# EAGLE board mainboard (EAGLE 9.6.2)
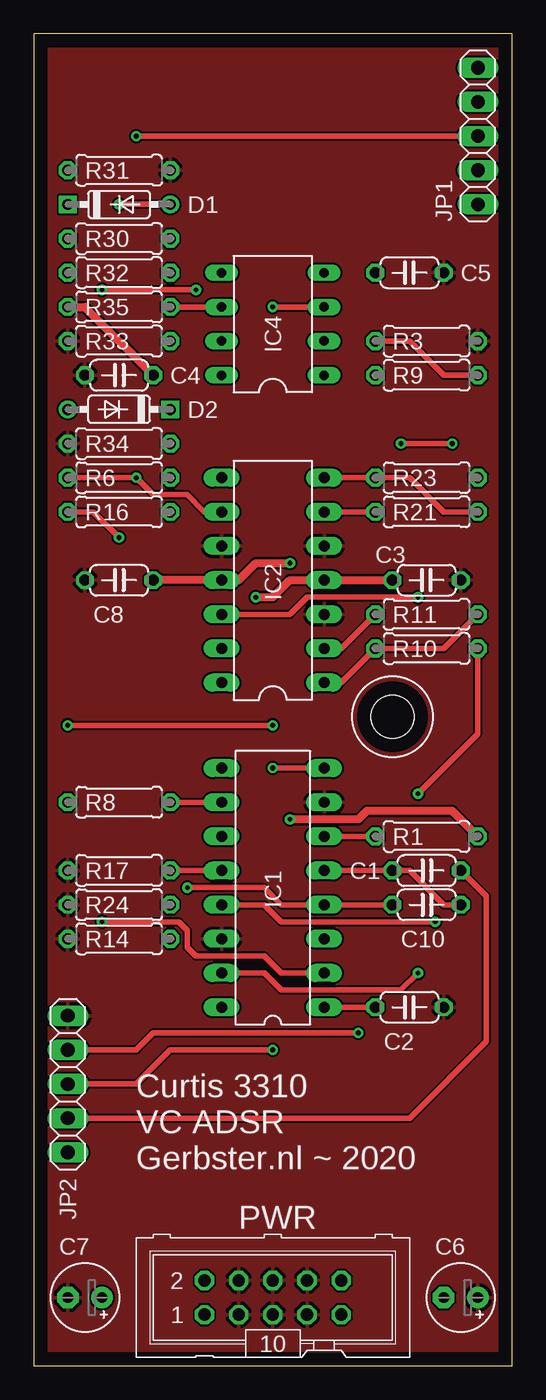
[diagram p0: board, top side]
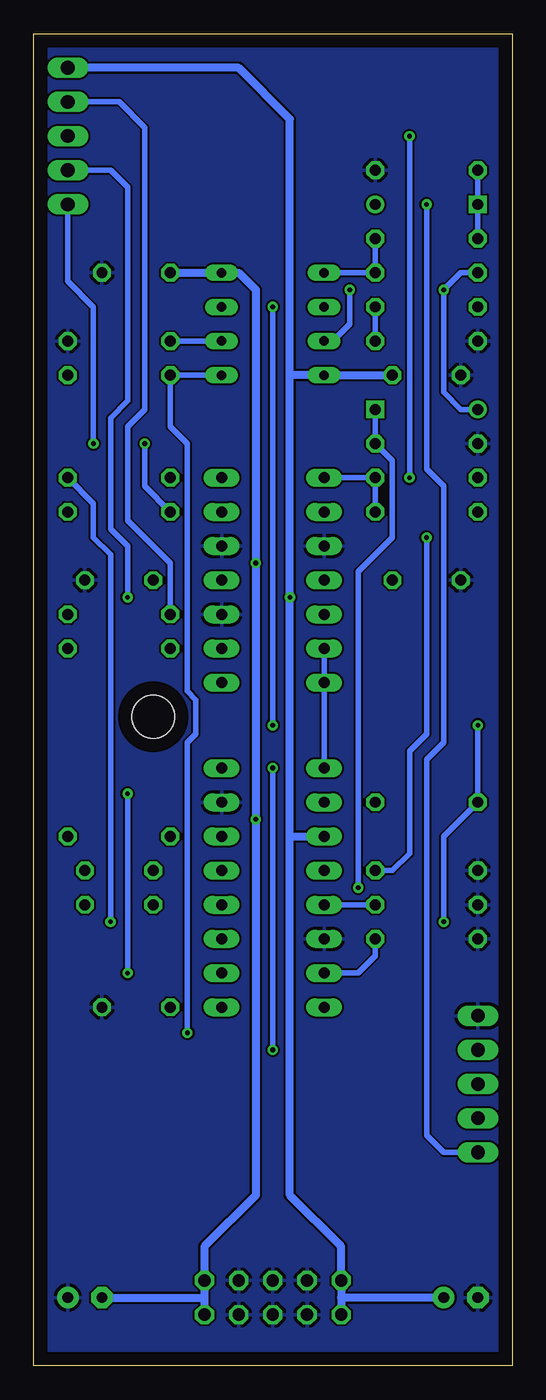
[diagram p1: board, bottom side, seen from below]

Size 35.56 x 99.06 mm. Coordinates in mm from the lower left corner, seen from the top.
Outline: 0,0 35.56,0 35.56,99.06 0,99.05 0,0
Copper layers (1*16): Top 0.035mm / dielectric 1.5mm / Bottom 0.035mm
Design rules "default": minimum track width 6mil, minimum drill 0.35mm, track to track 6mil, track to pad 6mil, pad to pad 6mil, via to via 6mil, smd to smd 6mil, copper to edge 40mil, drill to drill 6mil, minimum pad ring 10mil, minimum via ring 8mil, stop-mask expansion 4mil, vias tented up to drill 0mil, thermal gap 10mil
Holes 3.2 mm at 26.67,48.26

## Footprints (pad centres in the part's own frame; a part is rotated, then mirrored left to right if it is on the bottom)
C050-024X044 = drill 0.813 octagon: 1 -2.54,0; 2 2.54,0
E2,5-5 = drill 0.813 pad 1.6: + -1.27,0 | drill 0.813 pad 1.6 octagon: - 1.27,0
DO35-7 = drill 0.813: A 3.81,0 | drill 0.813 square: C -3.81,0
DIL16 = drill 0.813 long: 1 -8.89,-3.81; 2 -6.35,-3.81; 3 -3.81,-3.81; 4 -1.27,-3.81; 5 1.27,-3.81; 6 3.81,-3.81; 7 6.35,-3.81; 8 8.89,-3.81; 9 8.89,3.81; 10 6.35,3.81; 11 3.81,3.81; 12 1.27,3.81; 13 -1.27,3.81; 14 -3.81,3.81; 15 -6.35,3.81; 16 -8.89,3.81
DIL14 = drill 0.813 long: 1 -7.62,-3.81; 2 -5.08,-3.81; 3 -2.54,-3.81; 4 0,-3.81; 5 2.54,-3.81; 6 5.08,-3.81; 7 7.62,-3.81; 8 7.62,3.81; 9 5.08,3.81; 10 2.54,3.81; 11 0,3.81; 12 -2.54,3.81; 13 -5.08,3.81; 14 -7.62,3.81
DIL08 = drill 0.7 long: 1 -3.81,-3.81; 2 -1.27,-3.81; 3 1.27,-3.81; 4 3.81,-3.81; 5 3.81,3.81; 6 1.27,3.81; 7 -1.27,3.81; 8 -3.81,3.81
1X05 = drill 1.016 long: 1 -5.08,0; 2 -2.54,0; 3 0,0; 4 2.54,0; 5 5.08,0
ML10 = drill 0.914 octagon: 1 -5.08,-1.27; 2 -5.08,1.27; 3 -2.54,-1.27; 4 -2.54,1.27; 5 0,-1.27; 6 0,1.27; 7 2.54,-1.27; 8 2.54,1.27; 9 5.08,-1.27; 10 5.08,1.27
0207/7 = drill 0.813 octagon: 1 -3.81,0; 2 3.81,0

## Placement (x,y rotation side)
C1  .01uF  [C050-024X044]  29.21,36.83 0 top
C2  .15uF  [C050-024X044]  27.94,26.67 180 top
C3  .1uF  [C050-024X044]  29.21,58.42 180 top
C4  .1uF  [C050-024X044]  6.35,73.66 0 top
C5  .1uF  [C050-024X044]  27.94,81.28 180 top
C6  10uf  [E2,5-5]  31.75,5.08 180 top
C7  10uf  [E2,5-5]  3.81,5.08 180 top
C8  .1uF  [C050-024X044]  6.35,58.42 0 top
C10  .0033uF  [C050-024X044]  29.21,34.29 0 top
D1  [DO35-7]  6.35,86.36 0 top
D2  [DO35-7]  6.35,71.12 180 top
IC1  CEM3310  [DIL16]  17.78,35.56 90 top
IC2  TL074P  [DIL14]  17.78,58.42 90 top
IC4  TL072P  [DIL08]  17.78,77.47 90 top
JP1  [1X05]  33.02,91.44 270 top
JP2  [1X05]  2.54,20.95 90 top
PWR  [ML10]  17.78,5.08 0 top
R1  470R  [0207/7]  29.21,39.37 0 top
R3  8.2k  [0207/7]  29.21,76.2 180 top
R6  10k  [0207/7]  6.35,66.04 180 top
R8  22k  [0207/7]  6.35,41.91 180 top
R9  10k  [0207/7]  29.21,73.66 180 top
R10  10k  [0207/7]  29.21,53.34 180 top
R11  10k  [0207/7]  29.21,55.88 180 top
R14  470R  [0207/7]  6.35,31.75 180 top
R16  10k  [0207/7]  6.35,63.5 0 top
R17  470R  [0207/7]  6.35,36.83 180 top
R21  10k  [0207/7]  29.21,63.5 180 top
R23  10k  [0207/7]  29.21,66.04 180 top
R24  470R  [0207/7]  6.35,34.29 180 top
R30  20k  [0207/7]  6.35,83.82 0 top
R31  10k  [0207/7]  6.35,88.9 180 top
R32  1M  [0207/7]  6.35,81.28 180 top
R33  20k  [0207/7]  6.35,76.2 0 top
R34  10k  [0207/7]  6.35,68.58 0 top
R35  100k  [0207/7]  6.35,78.74 180 top

## Library data of the parts
C1-C8 C10 R1 R3 R6 R8-R11 R14 R16 R17 R21 R23 R24 R30-R35 = resistor
D1 D2 IC4 = TomW
IC1 = CEM
IC2 = linear
JP1 JP2 = pinhead
PWR = con-ml; OC_FARNELL: unknown; OC_NEWARK: unknown

## Nets
+12V: C3.2 C4.2 C7.+ IC1.11 IC2.4 IC4.8 JP1.1 PWR.1 PWR.2 R35.2
-12V: C5.2 C6.- C8.2 IC2.11 IC4.4 PWR.9 PWR.10 R1.2
A: IC1.15 R10.1 R14.1
ATK-MB: IC2.2 JP1.2 R11.2
D: IC1.12 R16.1 R17.1
DLY-MB: IC2.9 JP1.3 R6.2
G: C10.1 D2.C IC1.4 R34.2
GATE-MB: D1.A JP2.1
GND: C2.1 C3.1 C4.1 C5.1 C6.+ C7.- C8.1 IC1.7 IC1.14 IC2.3 IC2.5 IC2.10 JP2.5 PWR.3 PWR.4 PWR.5 PWR.6 PWR.7 PWR.8 R3.1 R14.2 R17.2 R24.2 R31.1 R33.1 R34.1
N$1: IC1.6 R1.1
N$4: C2.2 IC1.1
N$6: IC2.1 R10.2 R11.1
N$9: D1.C R30.1 R31.2
N$15: IC2.8 R6.1 R16.2
N$19: IC1.2 IC4.3 R8.2
N$21: IC2.7 R21.1 R23.2
N$22: IC4.5 R30.2 R32.1
N$23: IC1.10 R8.1
N$24: IC4.2 R3.2 R9.1
N$29: D2.A IC4.7 R32.2
N$30: IC4.6 R33.2 R35.1
OUTPUT-MB: IC4.1 JP2.4 R9.2
R: IC1.13 R23.1 R24.1
RANGE-MB: IC1.8 JP2.3
RE-TRIGGER-MB: C1.2 JP2.2
RLS-MB: IC2.6 JP1.5 R21.2
S: IC1.9 IC2.13 IC2.14
STN-MB: IC2.12 JP1.4
T: C1.1 C10.2 IC1.5

## Tracks (layer width: path | path; a pad name or v marks a point on that pad's centre or on a via)
+12V  (via drill 0.35)
  Top 0.61: C3.2 IC2.4 19.05,58.42 17.78,57.15 v16.51,57.15 | R35.2 3.81,78.74 C4.2
  Bottom 0.61: C4.2 IC4.8 16.51,73.66 | C7.+ 12.7,5.08 | 12.7,5.08 PWR.1 | 12.7,5.08 PWR.2 12.7,8.89 16.51,12.7 16.51,39.37 | 16.51,39.37 IC1.11 | 16.51,39.37 v16.51,57.15 16.51,73.66 | 16.51,73.66 16.51,92.71 20.32,96.52 JP1.1
-12V  (via drill 0.35)
  Top 0.61: C8.2 IC2.11 15.24,58.42 16.51,59.69 v19.05,59.69 | v19.05,40.64 24.13,40.64 24.77,41.27 31.11,41.27 R1.2
  Bottom 0.61: C5.2 IC4.4 20.32,81.28 19.05,80.01 v19.05,59.69 v19.05,40.64 19.05,12.7 22.86,8.89 PWR.10 22.86,5.08 | 22.86,5.08 PWR.9 | C6.- 22.86,5.08
A  (via drill 0.35)
  Top 0.406: IC1.15 17.14,29.21 18.41,27.94 27.3,27.94 v28.57,29.21 | v28.57,42.55 33.02,46.99 R10.1
  Bottom 0.406: R14.1 10.16,30.48 11.43,29.21 IC1.15 | v28.57,29.21 v28.57,42.55
ATK-MB
  Top 0.406: IC2.2 22.86,53.34 R11.2
  Bottom 0.406: JP1.2 29.21,93.98 27.3,92.08 27.3,71.12 28.57,69.85 28.57,62.87 25.4,59.69 R11.2
D  (via drill 0.35)
  Top 0.406: R17.1 IC1.12 | R16.1 4.45,63.5 v6.35,61.59
  Bottom 0.406: R17.1 8.89,36.83 7.62,38.1 7.62,45.72 6.35,46.99 v6.35,61.59
DLY-MB  (via drill 0.35)
  Top 0.406: R6.2 v7.62,66.04 8.89,64.77 11.43,64.77 12.7,63.5 IC2.9 | v7.62,91.44 JP1.3
  Bottom 0.406: v7.62,66.04 v7.62,91.44
G  (via drill 0.35)
  Top 0.406: C10.1 IC1.4 18.41,34.29 17.14,35.56 v11.43,35.56
  Bottom 0.406: D2.C R34.2 8.89,67.31 8.89,61.59 11.43,59.05 v11.43,35.56
GATE-MB  (via drill 0.35)
  Top 0.406: D1.A v6.35,86.36
  Bottom 0.406: v6.35,86.36 6.35,66.67 5.08,65.41 5.08,46.35 6.35,45.09 6.35,17.14 5.08,15.88 JP2.1
GND
  pour Top: 0,99.06 0,0 35.56,0 35.56,99.06
  pour Bottom: 0,99.06 0,0 35.56,0 35.56,99.06
N$1
  Top 0.406: IC1.6 R1.1
N$4
  Top 0.406: IC1.1 C2.2
N$6
  Top 0.406: IC2.1 22.86,50.8 R10.2 30.48,53.34 R11.1
N$9
  Bottom 0.406: R31.2 D1.C R30.1
N$15
  Bottom 0.406: IC2.8 R6.1 R16.2
N$19  (via drill 0.35)
  Top 0.406: v5.08,33.02 10.79,33.02 11.43,32.38 11.43,31.11 12.06,30.48 17.14,30.48 18.41,29.21 IC1.2 | IC4.3 v17.78,78.74 | v17.78,47.62 v2.54,47.62
  Bottom 0.406: v5.08,33.02 5.08,39.37 R8.2 v2.54,47.62 | v17.78,78.74 v17.78,47.62
N$21
  Top 0.406: IC2.7 R23.2 27.94,66.04 30.48,63.5 R21.1
N$22
  Bottom 0.406: IC4.5 R32.1 R30.2
N$23
  Top 0.406: R8.1 IC1.10
N$24
  Top 0.406: R3.2 27.94,76.2 30.48,73.66 R9.1
  Bottom 0.406: IC4.2 R3.2
N$29  (via drill 0.35)
  Top 0.406: v12.06,80.01 v5.08,80.01
  Bottom 0.406: IC4.7 13.34,76.2 12.06,77.47 v12.06,80.01 | R32.2 3.81,81.28 v5.08,80.01 5.08,72.39 3.81,71.12 D2.A
N$30
  Top 0.406: IC4.6 R35.1
  Bottom 0.406: R35.1 R33.2
OUTPUT-MB  (via drill 0.35)
  Top 0.406: v24.13,24.77 8.89,24.77 7.62,23.5 JP2.4
  Bottom 0.406: IC4.1 R9.2 25.4,69.85 24.13,68.58 24.13,50.16 23.5,49.53 23.5,46.99 24.13,46.35 v24.13,24.77
R  (via drill 0.35)
  Top 0.406: v29.84,33.02 18.41,33.02 17.14,34.29 IC1.13
  Bottom 0.406: R24.1 IC1.13 | R23.1 31.11,64.14 31.11,61.59 29.84,60.33 v29.84,33.02
RANGE-MB  (via drill 0.35)
  Top 0.406: IC1.8 v17.78,44.45 | v17.78,23.5 10.16,23.5 7.62,20.95 JP2.3
  Bottom 0.406: v17.78,44.45 v17.78,23.5
RE-TRIGGER-MB
  Top 0.406: C1.2 33.66,34.92 33.66,24.13 27.94,18.41 JP2.2
RLS-MB  (via drill 0.35)
  Top 0.406: IC2.6 R21.2 | v27.3,68.58 v31.11,68.58
  Bottom 0.406: JP1.5 33.02,80.64 31.11,78.74 v31.11,68.58 | R21.2 27.3,65.41 v27.3,68.58
S
  Bottom 0.406: IC2.13 IC2.14 IC1.9
STN-MB  (via drill 0.35)
  Top 0.406: v28.57,57.15 20.32,57.15 19.05,55.88 IC2.12
  Bottom 0.406: JP1.4 29.84,88.9 28.57,87.63 28.57,71.75 29.84,70.48 29.84,62.23 28.57,60.96 v28.57,57.15
T
  Top 0.406: IC1.5 C1.1 27.94,36.83 30.48,34.29 C10.2

## Text on the board
tPlace: Curtis 3310 / VC ADSR / Gerbster.nl ~ 2020